# Altium PCB stm32f103core.PcbDoc
Units mil, origin at the board's own origin, x right, y up, seen from the top; angles counter-clockwise.
Board outline 4570 x 1265 mil, 2 copper layers (Top Layer, Bottom Layer); 41 components, 47 nets, 156 pads, 35 vias.
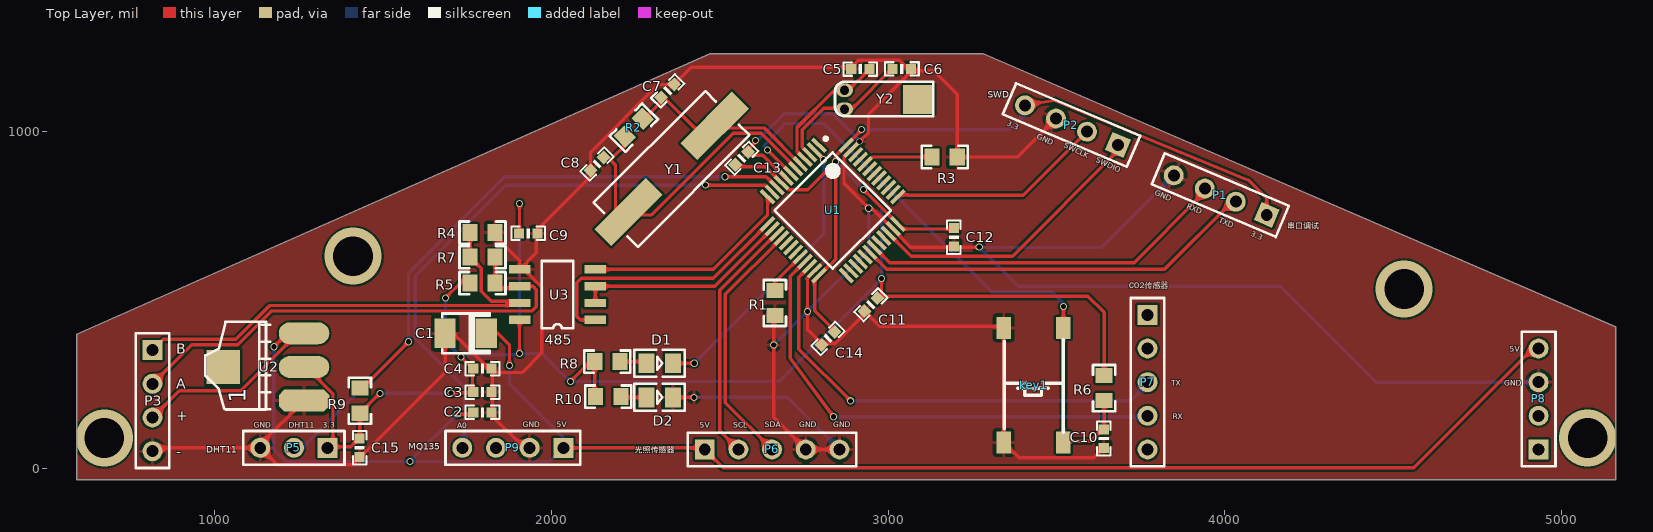
[diagram p0: Top Layer view]
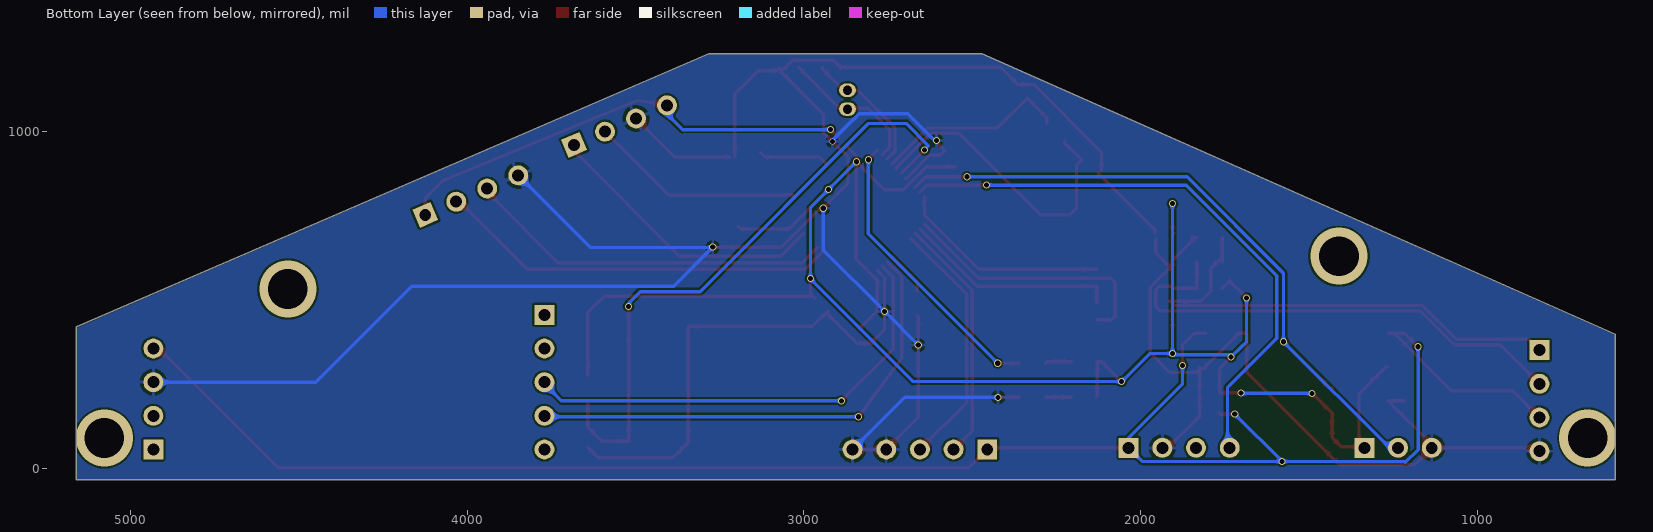
[diagram p1: Bottom Layer view, seen from below]

## Layer stack, top to bottom
Top Solder: solder mask 0.4, Solder Resist, Dk 3.5
Top Layer: signal copper 1.4
Dielectric 1: dielectric 12.6, FR-4, Dk 4.8
Bottom Layer: signal copper 1.4
Bottom Solder: solder mask 0.4, Solder Resist, Dk 3.5

## Board outline
590,-35 590,397.69 2470.22,1230 3282.11,1230 5160,419.09 5160,-35

## Design rules (kind name [scope] priority, off if disabled: settings)
Clearance [All] p1: gap=6 ignorepadtopadclearanceinfootprint=FALSE
ComponentClearance [All] p1: gap=0 collisioncheckmode=3 verticalgap=0 showdistances=FALSE
MinimumSolderMaskSliver [All] p1: minsoldermaskwidth=5
PolygonConnect [All] p1: connectstyle=Relief reliefconductorwidth=10 reliefentries=4 polygonreliefangle="90 Angle" airgapwidth=10
RoutingVias [All] p1: holewidth=28 width=50 viastyle="Through Hole" minholewidth=28 minwidth=50 maxholewidth=28 maxwidth=50
SolderMaskExpansion [All] p1: expansion=4
Width [All] p1: maxlimit=50 minlimit=8 preferedwidth=10
28 further rules are at their usual default settings.

## Components (designator, comment, footprint, x,y, rotation, side; value= is the part's Value field where it differs from the comment)
C1 "220uF" TAJ-B 1745,400 r0 top value=100pF
C2 "104" 0603p 1795,165 r180 top value=100pF
C3 "106" 0603p 1795,225.32 r180 top value=100pF
C4 "104" 0603p 1795,295.32 r180 top value=100pF
C5 "22pf" 0603p 2917.12,1185 r0 top value=100pF
C6 "22pf" 0603p 3040.52,1184.94 r180 top value=100pF
C7 "22pf" 0603p 2345,1120 r225 top value=100pF
C8 "22pf" 0603p 2135,902.8 r45 top value=100pF
C9 "104" 0603P 1930.47,696.79 r0 top value=100pF
C10 "104" 0603p 3640,87.5 r270 top value=100pF
C11 "104" 0603p 2948.25,485 r45 top value=100pF
C12 "104" 0603p 3195,685 r90 top value=100pF
C13 "104" 0603p 2565,920 r225 top value=100pF
C14 "104" 0603p 2821.08,385 r45 top value=100pF
C15 "104" 0603p 1430,60 r90 top value=100pF
D1 "LED0" LED0805 2320.88,311.1 r180 top
D2 "LED0" LED0805 2320.88,210 r180 top
key1 "Key" Key 3520,416.36 r270 top
P1 "Header 4" HDR1X4 4124.1,751.85 r157 top
P2 "SWD" HDR1X4 3682.09,959.86 r157 top
P3 "Header 4" HDR1X4 815,350 r270 top
P5 "Header 3" HDR1X3 1335,60 r180 top
P6 "Header 5" HDR1X5 2455,55.1 r0 top
P7 "Header 5" HDR1X5 3770,455 r270 top
P8 "Header 4" HDR1X4 4931.42,55 r90 top
P9 "Header 4" HDR1X4 2035,60 r180 top
R1 "10K" R0805 2662.4,490 r90 top value=1K
R2 "10k" R0805 2245,1010 r225 top value=1K
R3 "10K" R0805 3167.4,922.55 r180 top value=1K
R4 "360R" R0805 1795.01,700.22 r0 top value=1K
R5 "360R" R0805 1795.01,550.22 r0 top value=1K
R6 "10k" R0805 3639.94,237.4 r90 top value=1K
R7 "120R" R0805 1795.01,625.22 r180 top value=1K
R8 "10k" R0805 2165.88,315 r180 top value=1K
R9 "4.7K" R0805 1430,200 r90 top value=1K
R10 "10k" R0805 2168.48,211 r180 top value=1K
U1 "STM32F103C8T6" LQFP48 2835,765 r315 top
U2 "AMS1117-3.3" AMS1117 1264.94,199.97 r90 top
U3 "SP3485" SOP-8 2130,440 r180 top
Y1 "8M" 49SMD 2484.44,1016.12 r225 top
Y2 "32.768K" XTAL32 2870,1122 r0 top

## Footprints (in the part's own frame and the unit in brackets; to place one, negate y for a bottom-side part, rotate by r counter-clockwise, add the part's x,y. Pads: shape width x height; smd on the part's side, far side on the other; paste and mask are expansions set on the pad)
49SMD [mm] "8M"
  rect 5.5x1.8 smd: 1(0,0) 2(9.2,0)
  silkscreen extent -1.35,-2.35 10.55,2.35, body extent -2.93,-2.25 12.07,2.25, height 5.1
0603p [mil]
  rect 30x30 smd: 1(-27,0) 2(27.5,-0.06)
  silkscreen extent -50,-20 50,20
0603P [mil]
  rect 30x30 smd: 1(-27,0) 2(27.5,-0.06)
  silkscreen extent -50,-20 50,20
AMS1117 [mil]
  oct 65x150 smd: 1(0.03,-0.06)
  oval 65x150 smd: 2(100.03,-0.06) 3(200.03,-0.06)
  rect 100x100 smd: 4(100.03,239.94)
  silkscreen extent -26,100 234,293
HDR1X3 [mm] "Connector; Header; 3 Position"
  rect 1.5x1.5 hole 0.9: 1(0,0)
  round 1.5 hole 0.9: 2(2.54,0) 3(5.08,0)
  silkscreen extent -1.27,-1.27 6.35,1.27
HDR1X4 [mm] "Connector; Header; 4 Position"
  rect 1.5x1.5 hole 0.9: 1(0,0)
  round 1.5 hole 0.9: 2(2.54,0) 3(5.08,0) 4(7.62,0)
  silkscreen extent -1.27,-1.27 8.89,1.27
HDR1X5 [mm] "Connector; Header; 5 Position"
  rect 1.5x1.5 hole 0.9: 1(0,0)
  round 1.5 hole 0.9: 2(2.54,0) 3(5.08,0) 4(7.62,0) 5(10.16,0)
  silkscreen extent -1.27,-1.27 11.43,1.27
Key [mm] "四脚贴片按键"
  rect 1.65x1.1 smd: 1(0,0) 1(8.65,0) 2(0,-4.5) 2(8.65,-4.5)
  silkscreen extent 0.89,-4.44 7.87,0, body extent 0.07,-5.59 8.57,1.01, height 4.3
LED0805 [mm]
  rect 1.2x1.5 smd: 1(1,0) 2(-1,0)
  silkscreen extent -1.9,-1.02 1.91,1.02, body extent -1.01,-0.63 1.01,0.62, height 1.1
LQFP48 [mm] "TSQFP, 48-Leads, Body 7.00x7.00mm, Pitch 0.50mm, IPC Medium Density"
  rect 1.4x0.3 smd: 1(-4.2,2.75) 2(-4.2,2.25) 3(-4.2,1.75) 4(-4.2,1.25) 5(-4.2,0.75) 6(-4.2,0.25) 7(-4.2,-0.25) 8(-4.2,-0.75) 9(-4.2,-1.25) 10(-4.2,-1.75) 11(-4.2,-2.25) 12(-4.2,-2.75) 25(4.2,-2.75) 26(4.2,-2.25) 27(4.2,-1.75) 28(4.2,-1.25) 29(4.2,-0.75) 30(4.2,-0.25) 31(4.2,0.25) 32(4.2,0.75) 33(4.2,1.25) 34(4.2,1.75) 35(4.2,2.25) 36(4.2,2.75)
  rect 0.3x1.4 smd: 13(-2.75,-4.2) 14(-2.25,-4.2) 15(-1.75,-4.2) 16(-1.25,-4.2) 17(-0.75,-4.2) 18(-0.25,-4.2) 19(0.25,-4.2) 20(0.75,-4.2) 21(1.25,-4.2) 22(1.75,-4.2) 23(2.25,-4.2) 24(2.75,-4.2) 37(2.75,4.2) 38(2.25,4.2) 39(1.75,4.2) 40(1.25,4.2) 41(0.75,4.2) 42(0.25,4.2) 43(-0.25,4.2) 44(-0.75,4.2) 45(-1.25,4.2) 46(-1.75,4.2) 47(-2.25,4.2) 48(-2.75,4.2)
  silkscreen extent -4.32,-3.1 3.1,3.57, body extent -4.5,-4.5 4.5,4.5, height 1.6
R0805 [mm] "Chip Resistor, Body 1.6x0.8mm, IPC High Density"
  rect 1.14x1.27 smd: 1(-0.95,-0.025) 2(0.95,-0.025)
  silkscreen extent -1.74,-0.86 1.74,0.81, body extent -1.15,-0.67 1.15,0.68, height 0.76
SOP-8 [mil]
  rect 65x25 smd: 1(0,0) 2(0,-50) 3(0,-100) 4(0,-150) 5(224.41,-150) 6(224.41,-100) 7(224.41,-50) 8(224.41,0)
  silkscreen extent 65,-175 159,25
TAJ-B [mm] "钽电容"
  rect 1.6x2.25 smd: 1(1.55,0) 2(-1.55,0)
  silkscreen extent -1.78,-1.5 1.82,1.5, body extent -1.75,-1.4 1.75,1.4, height 1.9
XTAL32 [mil]
  oval 50x40 hole 28: 1(0,0) 2(0,-56)
  rect 92.13x86 smd: ""(220,-27)
  silkscreen extent -28,-77 264,25

## Part data
C1: library part "Cap Pol2", "极性电容", LatestRevisionDate=17-Jul-2002, LatestRevisionNote="Re-released for DXP Platform.", PackageDescription="Polarized Capacitor; 2 Leads", PackageReference=POLAR0.8, Published=8-Jun-2000, Publisher="Altium Limited"
C2 C3 C4 C5 C6 C7 C8 C9 C10 C11 C12 C13 C14 C15: library part C, "Capacitor", LatestRevisionDate=17-Jul-2002, LatestRevisionNote="Re-released for DXP Platform.", PackageDescription="Radial Cap, Thru-Hole; 2 Leads; 0.3 in Pin Spacing", PackageReference=RAD-0.3, Published=8-Jun-2000, Publisher="Altium Limited"
D1 D2: "Typical INFRARED GaAs LED", LatestRevisionDate=08-Jul-2005, LatestRevisionNote="Mech Layer 1 removed.", PackageDescription="LED; 2 Leads", PackageReference=LED-0, Published=8-Jun-2000, Publisher="Altium Limited"
P1 P3 P8 P9: "Header, 4-Pin", LatestRevisionDate=17-Jul-2002, LatestRevisionNote="Re-released for DXP Platform.", Publisher="Altium Limited"
P2: library part "Header 4", "Header, 4-Pin", LatestRevisionDate=17-Jul-2002, LatestRevisionNote="Re-released for DXP Platform.", Publisher="Altium Limited"
P5: "Header, 3-Pin", LatestRevisionDate=17-Jul-2002, LatestRevisionNote="Re-released for DXP Platform.", Publisher="Altium Limited"
P6 P7: "Header, 5-Pin", LatestRevisionDate=17-Jul-2002, LatestRevisionNote="Re-released for DXP Platform.", Publisher="Altium Limited"
R1 R2 R3 R4 R5 R6 R7 R8 R9 R10: library part R, "Resistor", LatestRevisionDate=17-Jul-2002, LatestRevisionNote="Re-released for DXP Platform.", PackageDescription="Axial Device, Thru-Hole; 2 Leads; 0.3 in Pin Spacing", PackageReference=AXIAL-0.3, Published=8-Jun-2000, Publisher="Altium Limited"
U2: library part AMS1117
U3: library part MAX3485
Y1 Y2: library part XTAL, "Crystal Oscillator", LatestRevisionDate=17-Jul-2002, LatestRevisionNote="Re-released for DXP Platform.", PackageDescription="Crystal, Thru-Hole; 2 Leads; Body 3.1 x 8.2 mm (Dia.xH)", PackageReference=R38, Published=8-Jun-2000, Publisher="Altium Limited"

## Via types
v1: diameter 21, hole 15, Top Layer to Bottom Layer, 30 vias
v2: diameter 169.29, hole 118.11, Top Layer to Bottom Layer, 4 vias
v3: diameter 18, hole 15, Top Layer to Bottom Layer, 1 vias

## Nets (pads, with @x,y where several pads share a name; then routed paths per layer and width w, separated by ;. In a path a pad name is that pad's centre, name@x,y a point inside that pad or via, vN(x,y) a via of type N, cw(c..) or ccw(c..) an arc to the next point about the centre after c; other vN are vias at no path point)
A0: P9.4 U1.11 | length 1755.1
  Top Layer w10: v1(2457.58,840.03) 2634.7,840.03 U1.11
  Bottom Layer w10: P9.4 1741.5,66.5 1741.5,239.29 1595,385.79 1595,571.37 1863.66,840.03 v1(2457.58,840.03)
BOOT0: R3.2 U1.44 | length 210.3
  Top Layer w10: U1.44 2951.79,923.55 3115.14,923.55 R3.2@3127.6,936
BOOT1: R1.2 U1.20 | length 131.1
  Top Layer w10: R1.2 2663.4,551.64 U1.20
DHT11: P5.2 R9.2 U1.10 | length 2102.7
  Top Layer w10: R9.2 1437.79,237.4 v1(1575.39,375) ; v1(2515,865) 2636.57,865 2637.01,865.44 2669.25,833.21 U1.10
  Bottom Layer w10: P5.2 1260.39,60 v1(1575.39,375) 1575.39,579.17 1861.66,865.44 2460.21,865.44 2460.65,865 v1(2515,865)
GND: C1.2 C2.1 C3.1 C4.1 C5.1 C6.1 C7.1 C8.1 C9.2 C10.2 C11.1 C12.1 C13.1 C14.1 C15.1 D2.2 key1.2 P1.4 P2.3 P3.4 P5.3 P6.4 P6.5 P8.3 P9.2 R1.1 R3.1 R4.2 U1.8 U1.23 U1.35 U1.47 U2.1 U3.5 | length 11709.8
  Top Layer w10: P3.4 825,60 P5.3 ; U2.1@1215.79,200 U2.1 1135,70 P5.3 ; C4.1@1821,294.31 1814.12,294.31 1708.44,400 C1.2 1683.98,284.45 1409.53,10 1185,10 P5.3 ; C4.1@1824.53,301.03 C4.1@1824.53,295.31 ; R4.2@1832.4,684 1846,684 1846,675.63 1905.59,616.04 U3.5 ; P9.2 1918.74,60 1824.53,154.21 1824.53,225.32 C4.1@1824.53,295.31 ; C9.2@1955,681.79 1955,639.41 U3.5 ; C9.2 1957.97,707.97 C8.1@2125.91,875.91 ; C8.1 2115.91,938.06 2316.94,1139.09 C7.1 2415.06,1190.06 C5.1@2890.12,1190.06 ; D2.2 v1(2423,210) v1@2425,212 ; C13.1@2579.6,941.55 2605.77,967.72 v1(2605.77,972.28) ; C13.1 2594.49,928.7 2626.98,928.7 2694.63,861.04 U1.8 ; R1.1 2660,449.2 v1(2660,365.03) 2660,150.1 P6.4 P6.5 ; U1.23 2757.84,562.57 2759.97,560.44 v1(2759.97,465) 2759.97,411.85 C14.1@2796.9,374.91 ; C14.1@2796.9,370 2842.94,370 2929.16,456.22 C11.1 2974.52,420.55 3342.83,420.55 3342.83,416.36 3342.83,75.81 3388.65,30 3609.94,30 C10.2 ; U1.47 2868.54,923.82 2868.54,845.07 v1(2942.09,771.52) 2951.19,771.52 3066.92,655.79 v1(3270.21,655.79) ; U1.47@2889.87,944.97 2928.4,983.5 2928.91,983.5 2941.5,996.09 2941.5,1051.12 3067.52,1177.14 C6.1 3058.64,1184.94 3032.57,1211 2911,1211 2890.12,1190.12 C5.1@2890.12,1190.06 ; C5.1 C5.1@2890.12,1190.06 ; C6.1@3071.29,1188.71 3080,1180 3135,1180 3204.8,1110.2 R3.1 ; R3.1@3218.33,923.55 3383.53,923.55 3479.06,1019.07 P2.3@3500.25,1019.07 ; C4.1@1824.53,295.31 1836.34,283.5 1912.4,283.5 1971,342.1 1971,536.63 1917.63,590 U3.5
  Bottom Layer w10: v1(2423,210) 2700.1,210 P6.5 ; v1(2605.77,972.28) 2610.32,972.28 2690.55,1052.5 2834.66,1052.5 2852.16,1035 2852.54,1035 2917.54,970 2917.47,969.92 v3(2914.98,969.92) ; v1(2660,365.03) v1(2759.97,465) 2942.09,647.12 v1(2942.09,771.52) ; v1(3270.21,655.79) v1@3270.96,655.04 ; P1.4 3633.91,655.04 v1@3270.96,655.04 ; P8.3 4449,255 4164.18,539.82 3386.18,539.82 v1@3270.96,655.04
LED0: D1.2 U1.2 | length 867.6
  Top Layer w10: D1.2 v1(2423.81,311.1) ; U1.2 2808.23,917.05 v1(2808.23,915.44)
  Bottom Layer w10: v1(2423.81,311.1) 2808.23,695.52 v1(2808.23,915.44)
NetC7_2: C7.2 R2.1 U1.5 Y1.1 | length 582.4
  Top Layer w10: R2.1@2278.58,1023.26 2278.58,1040.2 2336.69,1098.31 2425.22,1009.78 2631.98,1009.78 U1.5
NetC8_2: C8.2 R2.2 U1.6 Y1.2 | length 915.1
  Top Layer w10: R2.2@2225.68,970.36 2225.68,965.98 2174.49,914.79 2190,899.28 2190,771.52 2210,751.52 2297,751.52 2539.26,993.78 2622.71,993.78 2725.04,891.45 U1.6
NetD1_1: D1.1 R8.1 | length 80.3
  Top Layer w10: R8.1 2276.61,316 D1.1
NetD2_1: D2.1 R10.1 | length 76.5
  Top Layer w10: R10.1 2207.88,210 D2.1
NetP3_1: P3.1 R4.1 R7.2 U3.7 | length 1505.5
  Top Layer w10: P3.1@792,327 P3.1 847,382 1062,382 1162.5,482.5 1898.09,482.5 U3.7 ; R7.2@1757.6,611 R4.1@1757.6,684 ; R7.2 1791.05,592.78 1791.05,525.05 1821.1,495 U3.7@1915,495
NetP3_2: P3.2 R5.2 R7.1 U3.6 | length 1492.2
  Top Layer w10: P3.2 931,366 1068.63,366 1169.13,466.5 1942.65,466.5 1955,478.85 1955,530 1945,540 U3.6 1899.59,534 1832.4,534 R7.1@1832.4,611
PA2: U1.12 U3.4 | length 632.3
  Top Layer w10: U3.4 2480,590 2641.52,751.52 U1.12
PA3: U1.13 U3.1 | length 798
  Top Layer w10: U3.1 2085,440 2075,450 2075,550 2088.5,563.5 2480.39,563.5 U1.13
PA4: U1.14 U3.2 U3.3 | length 646.2
  Top Layer w10: U3.2 U3.3 2484.73,540 U1.14
PA7: U1.17
PA8: U1.29
PA11: U1.32
PA12: U1.33
PA15: U1.38
PB0: U1.18
PB1: U1.19
PB3: U1.39
PB4: U1.40
PB5: U1.41
PB6: U1.42
PB7: U1.43
PB8: U1.45
PB9: U1.46
PB12: U1.25
PB13: U1.26
PB14: U1.27
PB15: U1.28
PC14: C6.2 U1.3 Y2.2 | length 430.5
  Top Layer w10: U1.3 2766.39,930.64 2745,952.04 2745,1004.6 2808.91,1068.51 2893.95,1068.51 C6.2@3015.5,1190.06
PC15: C5.2 U1.4 Y2.1 | length 397
  Top Layer w10: U1.4 2729,940.6 2729,1011.22 2839.78,1122 Y2.1 2881.69,1122 C5.2 C5.2@2944.62,1190
RESET: C10.1 key1.1 R6.1 U1.7 | length 1881.3
  Top Layer w10: v1(2641.08,945) U1.7 ; v1@3520,480 3520,416.36 3520,80 3600,80 3640.94,120.94 R6.1
  Bottom Layer w10: v1(2641.08,945) 2641.08,946.22 2629.92,957.38 2695.79,1023.26 2807.66,1023.26 3307.09,523.82 3486.18,523.82 3520.11,489.89 v1(3520.11,480)
RX: P7.4 U1.21 | length 1463.7
  Top Layer w10: U1.21 2709,569.4 2709,326 v1(2837.78,152.22)
  Bottom Layer w10: v1(2837.78,152.22) P7.4@3779.77,152.22
RXD: P1.3 U1.31 | length 1096.8
  Top Layer w10: U1.31 3003.92,610 3730,610 3927.95,807.95 3927.95,817.95 P1.3
SCL: P6.2 U1.15 | length 734.6
  Top Layer w10: P6.2 2500,110.1 2500,527.44 U1.15
SDA: P6.3 U1.16 | length 754.6
  Top Layer w10: P6.3 2516,194.1 2516,515.6 U1.16
SWCLK: P2.2 U1.37 | length 612.7
  Top Layer w10: U1.37 3034.11,811 3056.63,811 3057.63,810 3401.11,810 3568.92,977.82
SWDIO: P2.1 U1.34 | length 857
  Top Layer w10: U1.34 3068.44,629 3369,629 3682.09,942.09 P2.1
TX: P7.3 U1.22 | length 1372.4
  Top Layer w10: U1.22 2734.6,567.16 2734.6,353.03 v1(2887.94,199.69)
  Bottom Layer w10: v1(2887.94,199.69) 3719.69,199.69 P7.3@3765,245
TXD: P1.2 U1.30 | length 1194.1
  Top Layer w10: U1.30 2995.77,590.31 3820.31,590.31 4020.93,790.93 P1.2 P1.2@4030,792.98
VBAT: U1.1
VCC3.3: C3.2 C4.2 C9.1 C11.2 C12.2 C13.2 C14.2 C15.2 P1.1 P2.4 P5.1 R5.1 R6.2 R8.2 R9.1 R10.2 U1.9 U1.24 U1.36 U1.48 U2.2 U3.8 | length 7498.4
  Top Layer w10: U2.2 1271.81,300 1351,220.81 1351,76 P5.1@1338.13,63.13 ; P5.1 1335,63.13 P5.1@1338.13,63.13 ; v1(1490,221.6) R9.1 1431,90.53 1403.6,63.13 P5.1@1338.13,63.13 ; v1(1685,505) 1735.8,555.8 1749.99,541.61 R5.1@1757.6,534 ; v1(1701.05,223.06) 1765.47,223.06 1765.47,295.31 v1(1730.79,330) ; C9.1@1900.94,696.79 1905,700.85 v1(1905,785) ; v1(1905,340) 1905,439.41 U3.8 ; v1(2056.01,256.81) 2115.2,316 R8.2 2128.48,214.6 R10.2 ; C13.2@2549.91,895 2635.4,895 U1.9 2704.02,826.38 2760.57,826.38 v1(2843.65,909.46) ; C14.2@2835.48,413.41 2781.47,467.42 2781.47,558.36 U1.24 2843.65,620.54 v1(2843.65,909.46) ; U1.48 2843.65,926.76 v1(2843.65,909.46) ; 2895.86,979.09 2909.08,992.3 2920,1003.23 v1(2920,1005) ; v1(2926.56,826.56) 3043.11,710 3187.56,710 C12.2@3195.06,717.5 ; C11.2 C11.2@2973.34,510 ; v1(2980.12,562.57) 2980.12,516.77 C11.2@2973.34,510 ; P2.4@3434.59,1082.69 3494.07,1091.59 3534.39,1074.91 4070.54,854.19 4124.1,800.63 P1.1 ; R6.2 3640.94,461.93 3592.87,510 C11.2@2973.34,510
  Bottom Layer w10: v1(1490,221.6) 1699.58,221.6 v1(1701.05,223.06) ; v1(1685,505) 1685,375.31 1700,360.31 1700,360 1730,330 v1(1730.79,330) 1730.79,332.21 1726.5,336.5 1901.5,336.5 v1(1905,340) 1972.82,340 v1(2056.01,256.81) 2674.36,256.81 v1(2980.12,562.57) 2980.12,772.99 v1(2926.56,826.56) v1(2843.65,909.46) ; v1@1905,344.82 v1(1905,785) ; v1(2920,1005) 3360,1005 3405.94,1050.94 P2.4
VCC5: C1.1 C2.2 P3.3 P6.1 P8.4 P9.1 U2.3 | length 5599.4
  Top Layer w10: P3.3 895,230 1077,230 U2.3@1247,400 ; v1(1175.53,360.17) 1215.35,400 U2.3@1247,400 ; U2.3 U2.3@1247,400 ; v1(1720,160) 1762.44,160 C2.2 ; C1.1 1840,400 1875.35,364.65 1875,364.29 v1(1875,305) ; P9.1 2450.1,60 P6.1 2455,55 2509.48,0.52 4560.52,0.52 4915,355 P8.4
  Bottom Layer w10: 1175.53,54.47 1213.31,16.69 1216.09,19.47 v1(1579.47,19.47) v1(1720,160) ; 1175.53,56.71 v1(1175.53,360.17) ; v1@1589.47,19.47 1994.47,19.47 P9.1 2035,90.53 1875,250.53 v1(1875,305)
pads on no net: P7.1 P7.2 P7.5 P8.1 P8.2 P9.3 U2.4 Y2.
copper on no net:
  other v2: 672,89 5077,89 4532,531.4 1410.6,629

## Polygon pours and split planes (outlines as drawn)
GND on Top Layer "Top Layer-No Net" (solid, remove dead copper, pour order 2): 590,397.69 590,-35 5160,-35 5160,419.09 3282.11,1230 2470.22,1230
GND on Bottom Layer "Top Layer-No Net" (solid, remove dead copper, pour order 4): 3282.11,1230 2470.22,1230 590,395 590,-35 5160,-35 5160,415

## Silkscreen, mask and mechanical layers (free items; w line width, h text height)
Top Overlay:
  text "SWD" at 3295,1100 h20
  text "3.3" at 3350,1018.08 h16 r335
  text "GND" at 3440,980.02 h16 r335
  text "SWCLK" at 3520.11,951.87 h16 r335
  text "SWDIO" at 3615,909.46 h16 r335
  text "GND" at 3790,811.12 h16 r337
  text "RXD" at 3885,771.52 h16 r337
  text "TXD" at 3980,730 h16 r337
  text "串口调试" at 4185,705 h30
  text "3.3" at 4075,690 h16 r337
  text "CO2传感器" at 3715,527.4 h30
  text "485" at 1980,366 h30
  text "5V" at 4845,345 h16
  text "B" at 885,340 h30
  text "TX" at 3840,245 h16
  text "GND" at 4830,245 h16
  text "A" at 885,235 h30
  text "RX" at 3845,145 h16
  text "+" at 885,140 h30
  text "GND" at 1915,121.6 h16
  text "5V" at 2015,121.6 h16
  text "GND" at 1115,120 h16
  text "DHT11" at 1220,120 h16
  text "3.3" at 1320,120 h16
  text "5V" at 2440,120 h16
  text "SCL" at 2539.25,120 h16
  text "SDA" at 2633.53,120.55 h16
  text "GND" at 2735,120.55 h16
  text "GND" at 2836.51,120.55 h16
  text "A0" at 1720,117.81 h16
  text "MQ135" at 1575,55 h20
  text "DHT11" at 975,45 h20
  text "光照传感器" at 2247.18,40 h30
  text "-" at 885,33 h30
Mechanical 1:
  lines w7.87: 590,397.69 590,-35 5010,-35 5030,-35 5160,-35 5160,419.09 ; 2470.22,1230 3282.11,1230
  lines w10: 590,397.69 2470.22,1230 ; 3282.11,1230 5160,419.09

## Text inside footprints (layer, text, board x,y; h text height)
U2: Top Overlay "1" at 1092,194 h50 r90